# Altium PCB PROTO_QTOUCH.PcbDoc
Units mil, origin at the board's own origin, x right, y up, seen from the top; angles counter-clockwise.
Board outline 2460.63 x 2460.63 mil, 4 copper layers (Top Layer, Ground Plane, Power Plane, Bottom Layer), stack 64.6 mil thick; 61 components, 100 nets, 292 pads, 150 vias.
Unrouted connection lines stored in the file: 1.
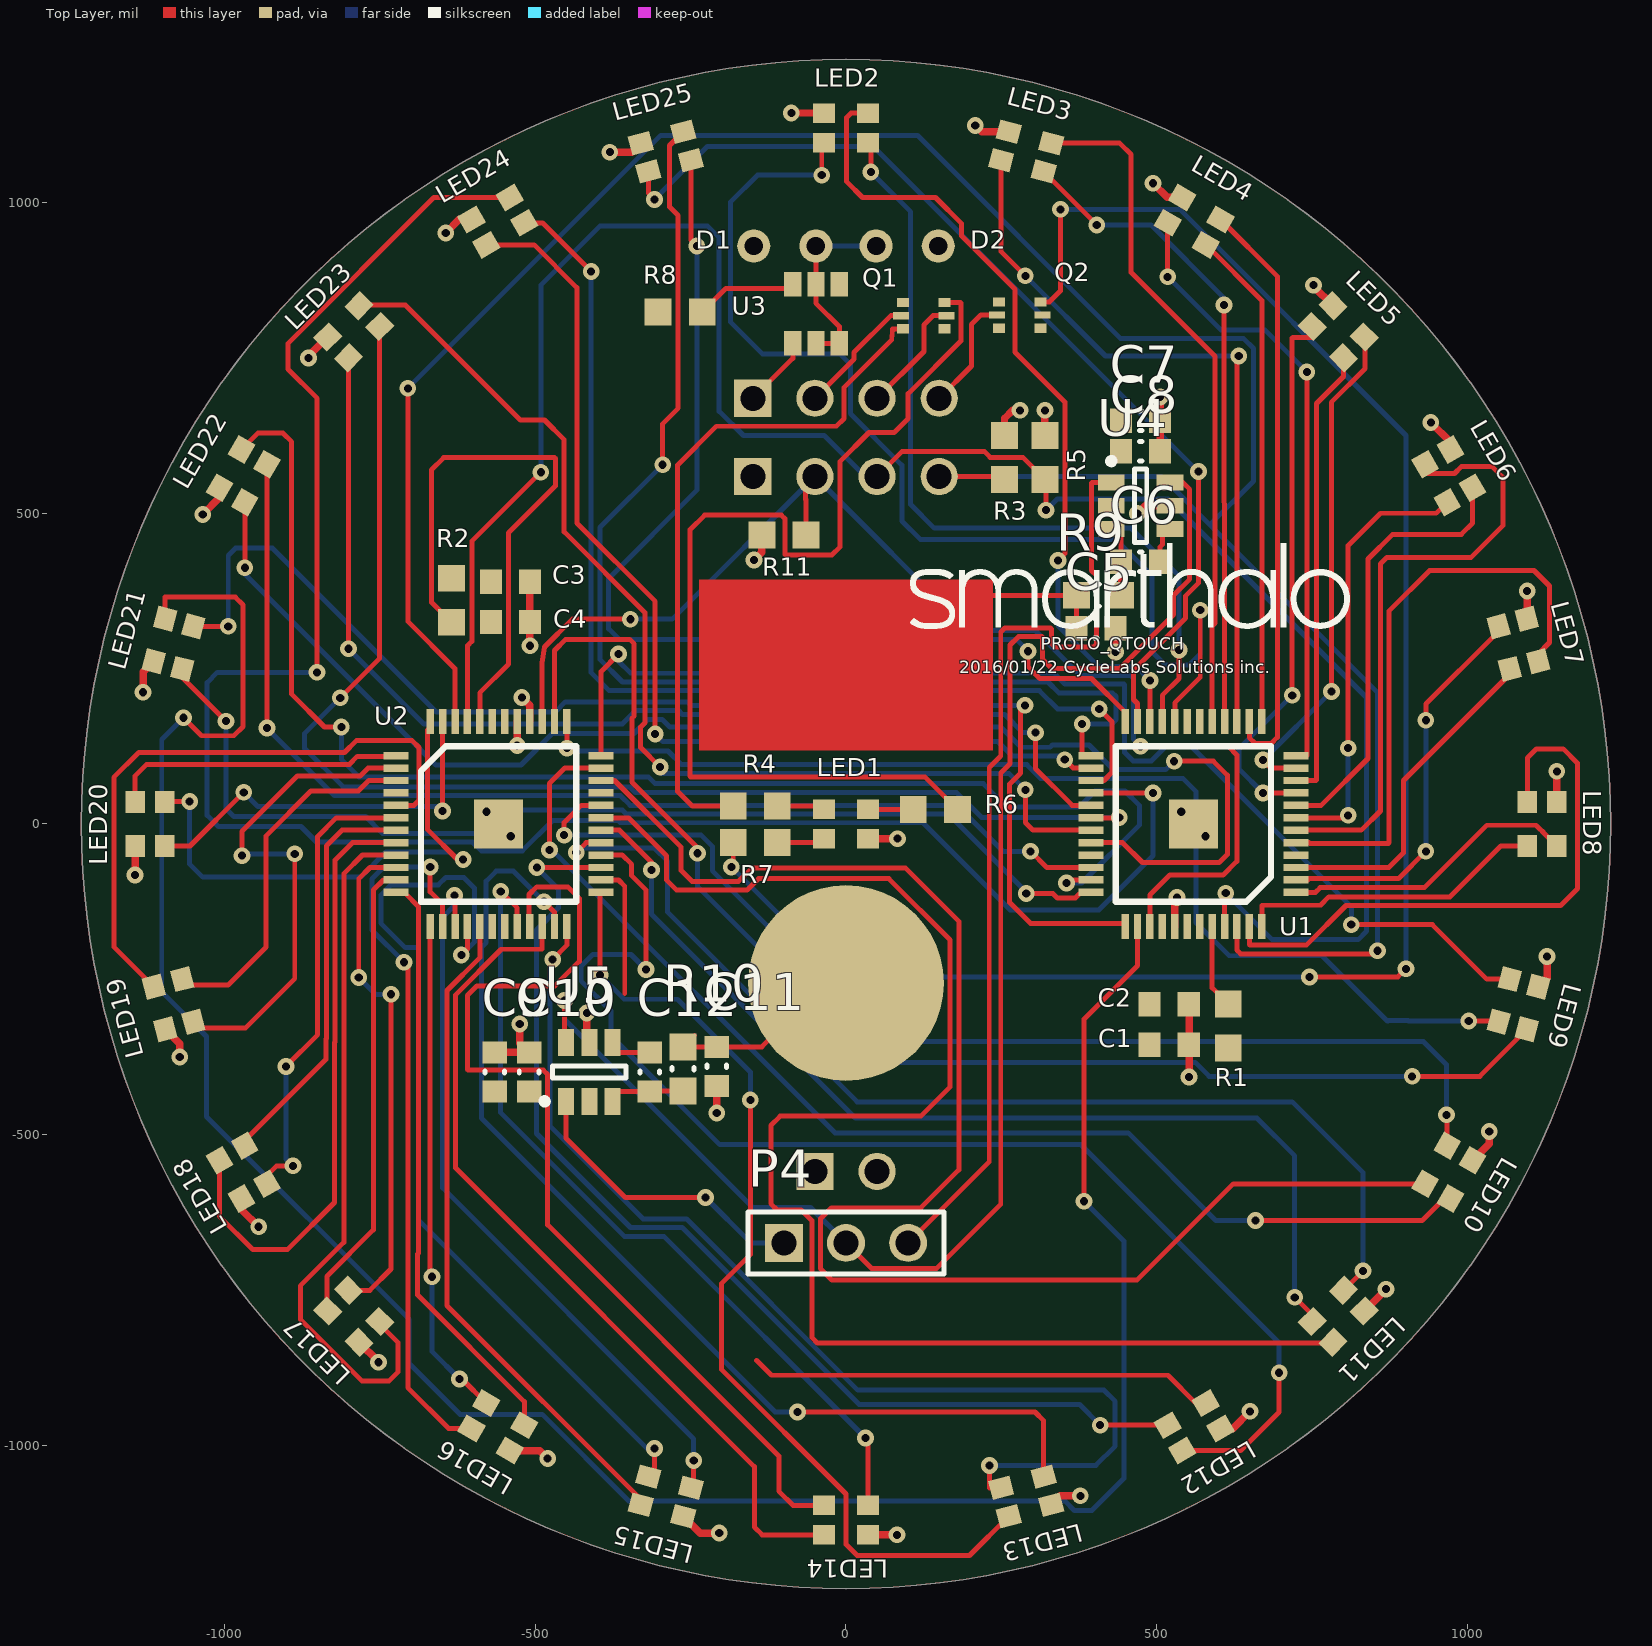
[diagram p0: Top Layer view]
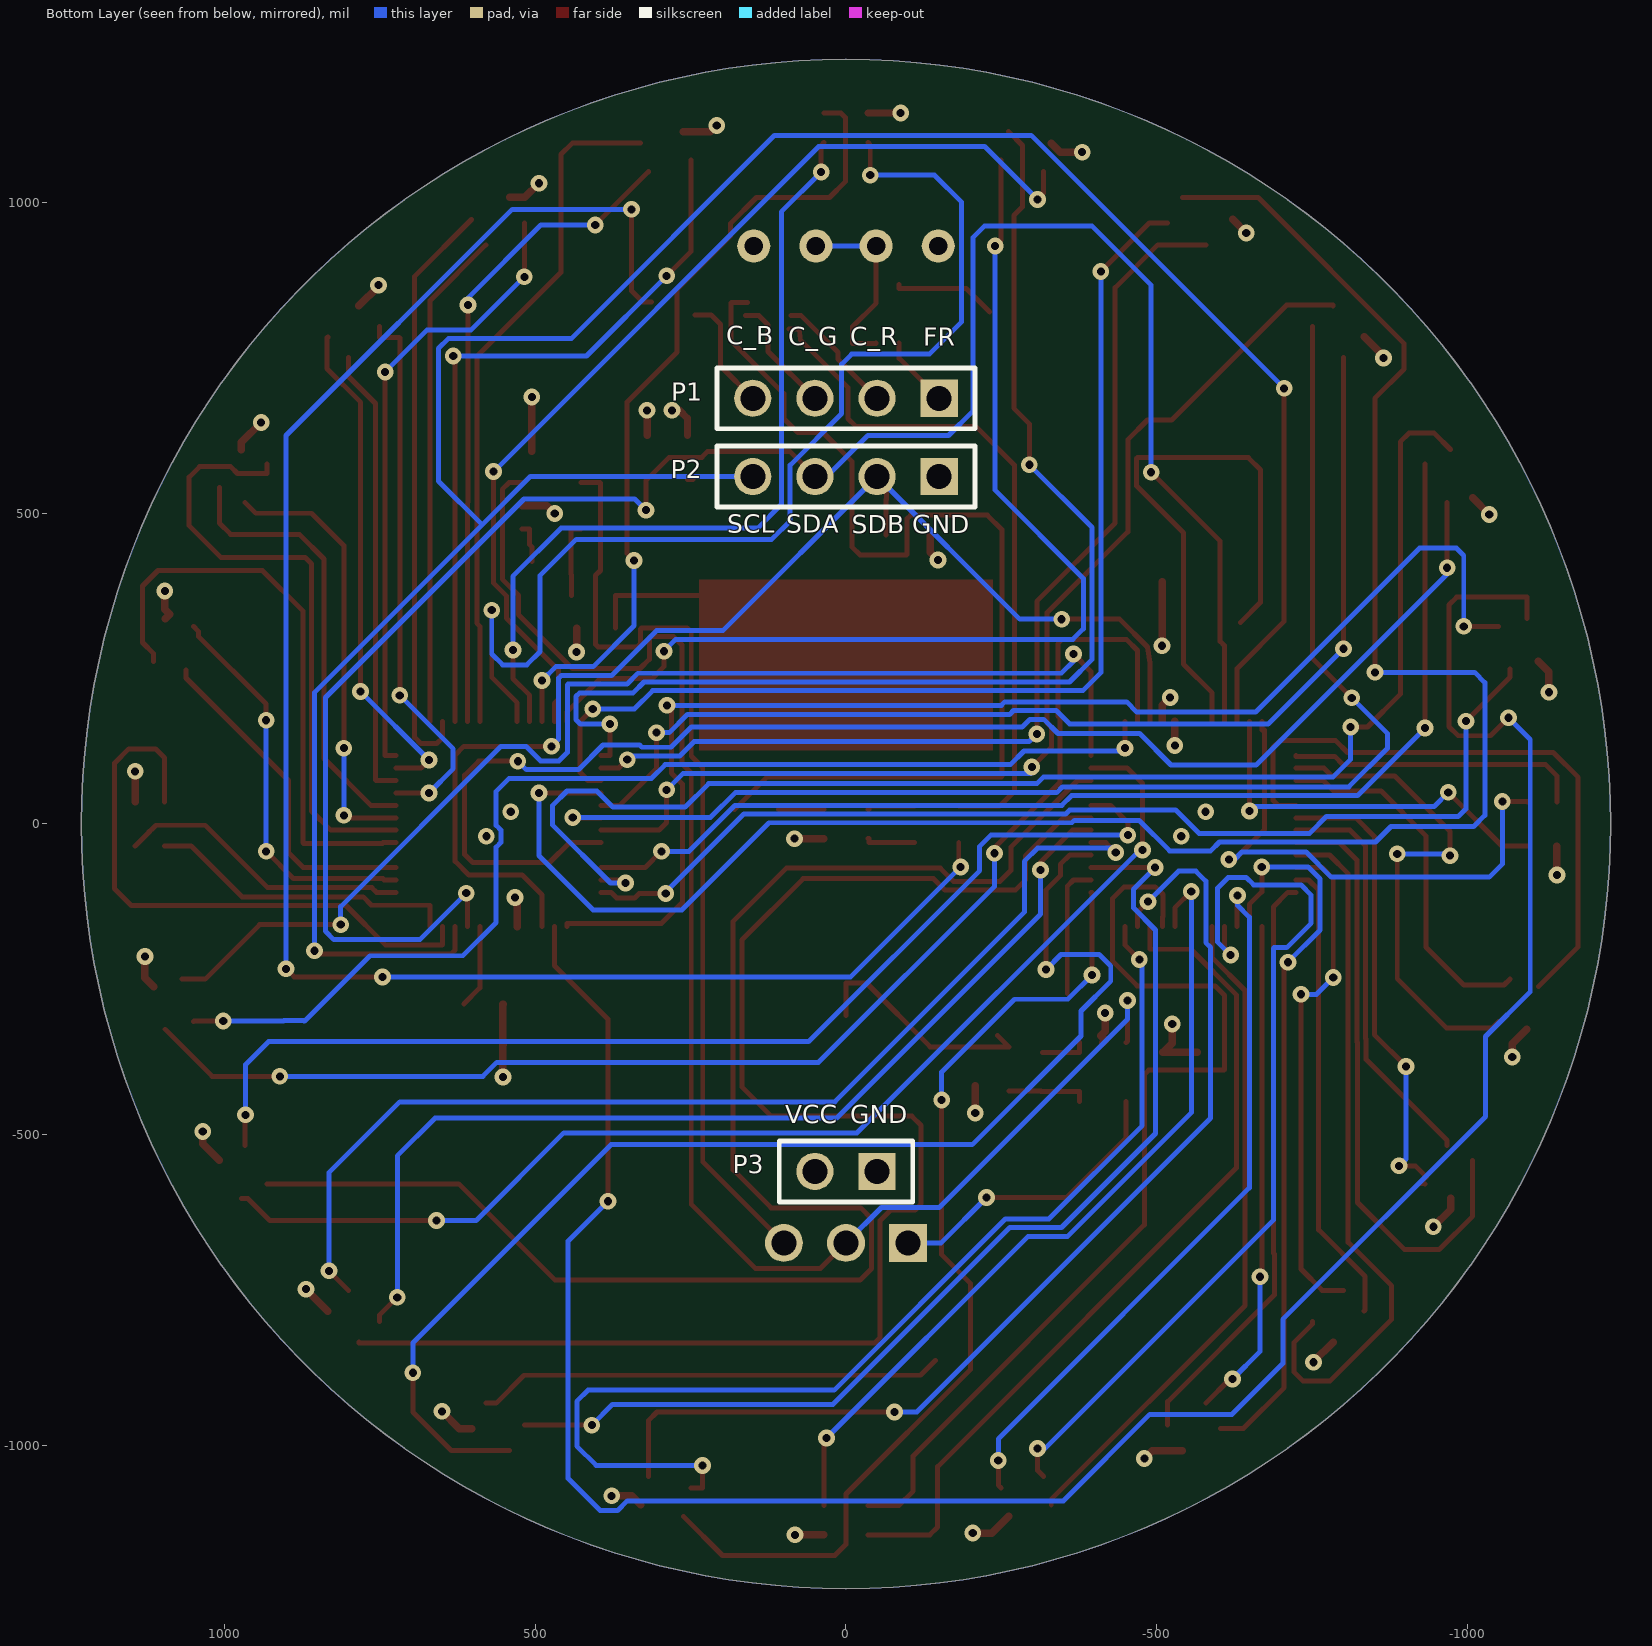
[diagram p1: Bottom Layer view, seen from below]
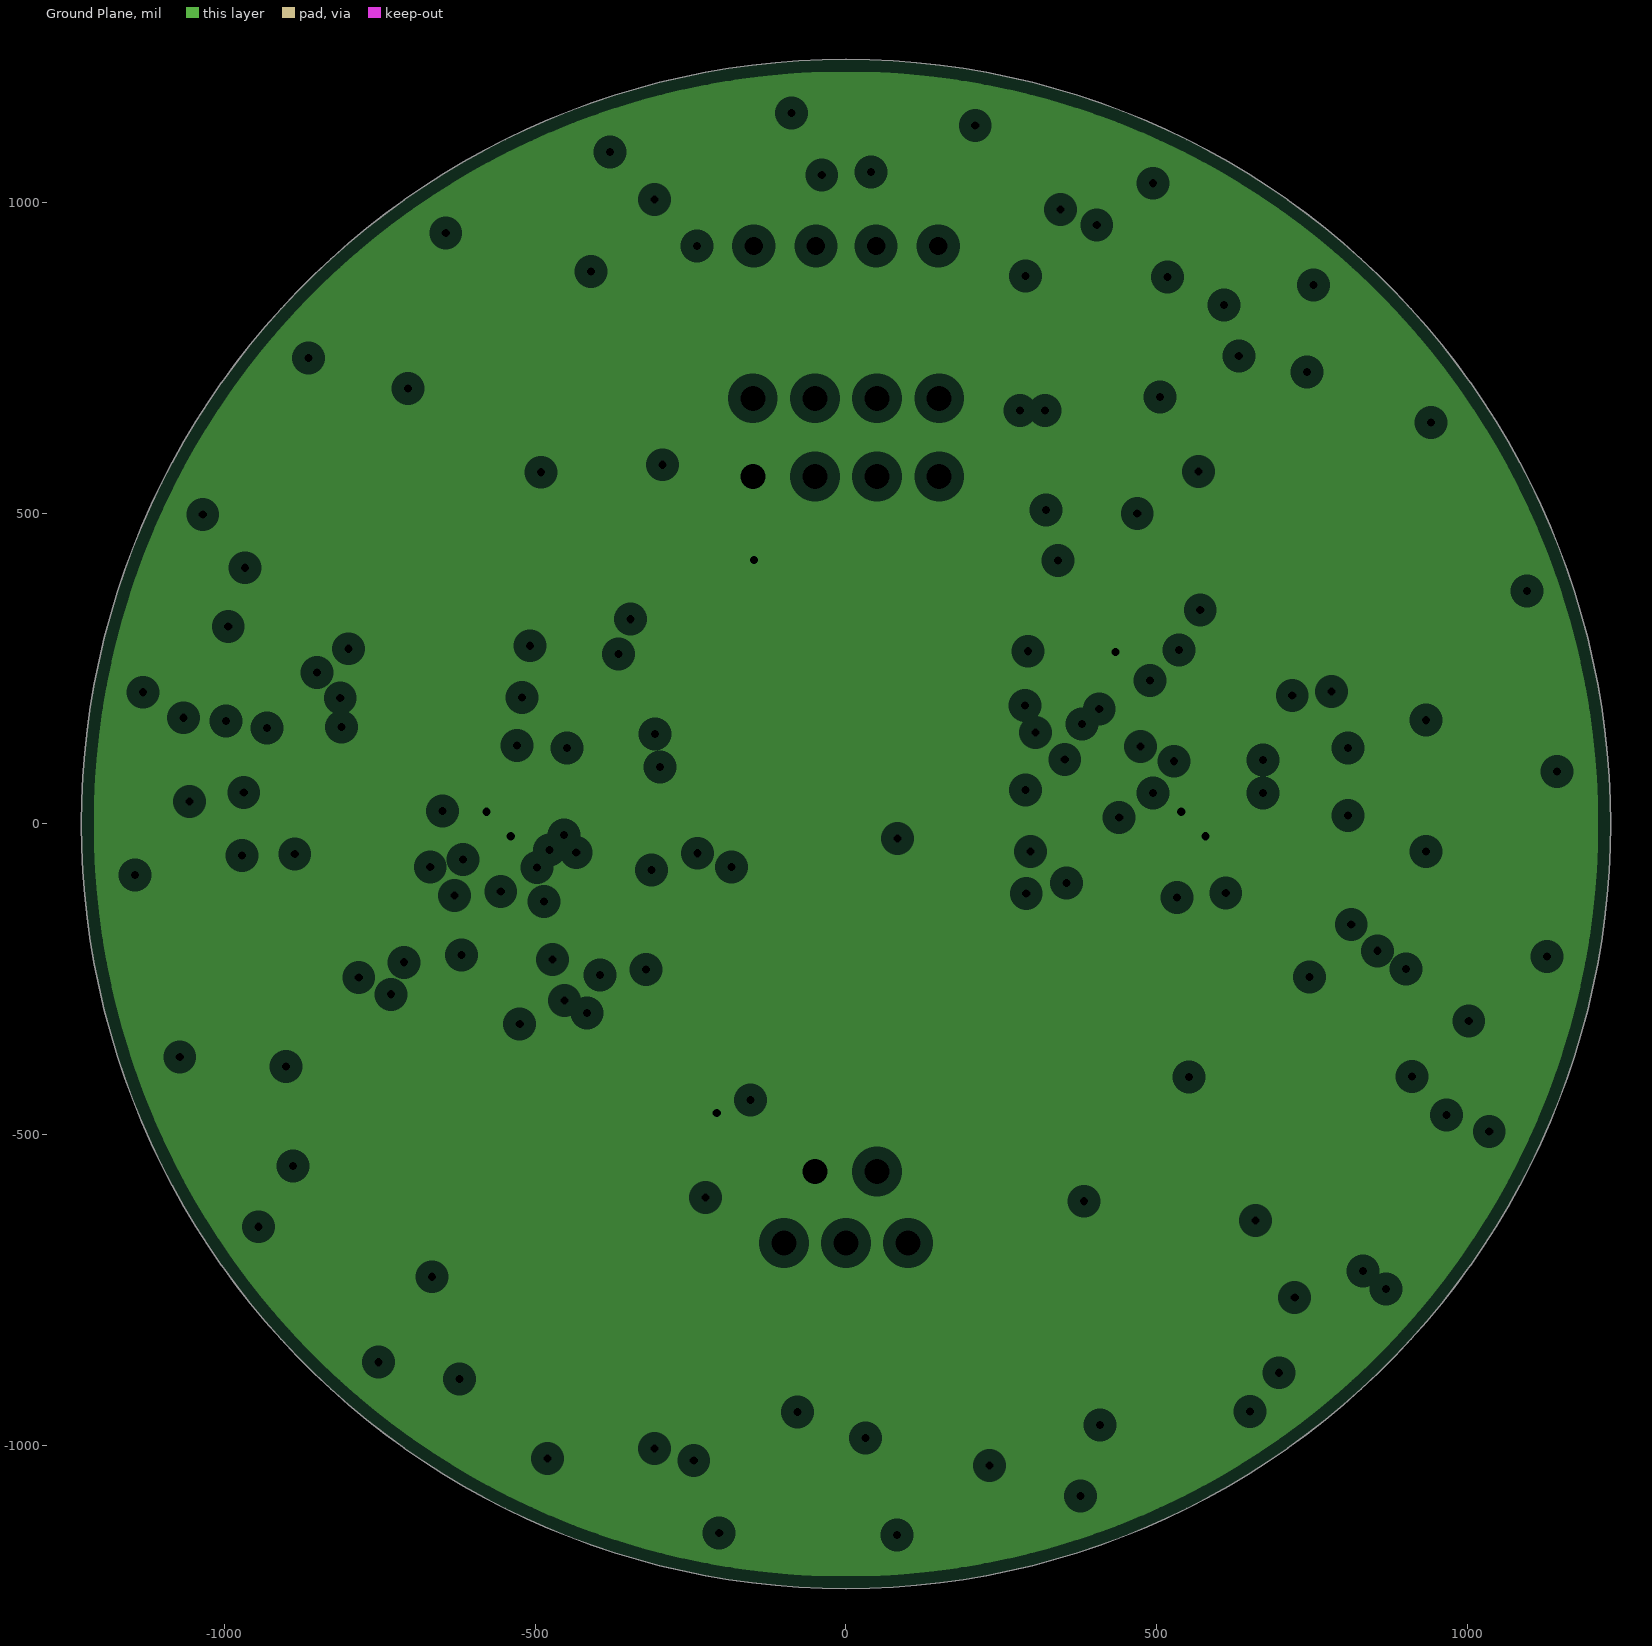
[diagram p2: Ground Plane, clearances drawn from the general rule]
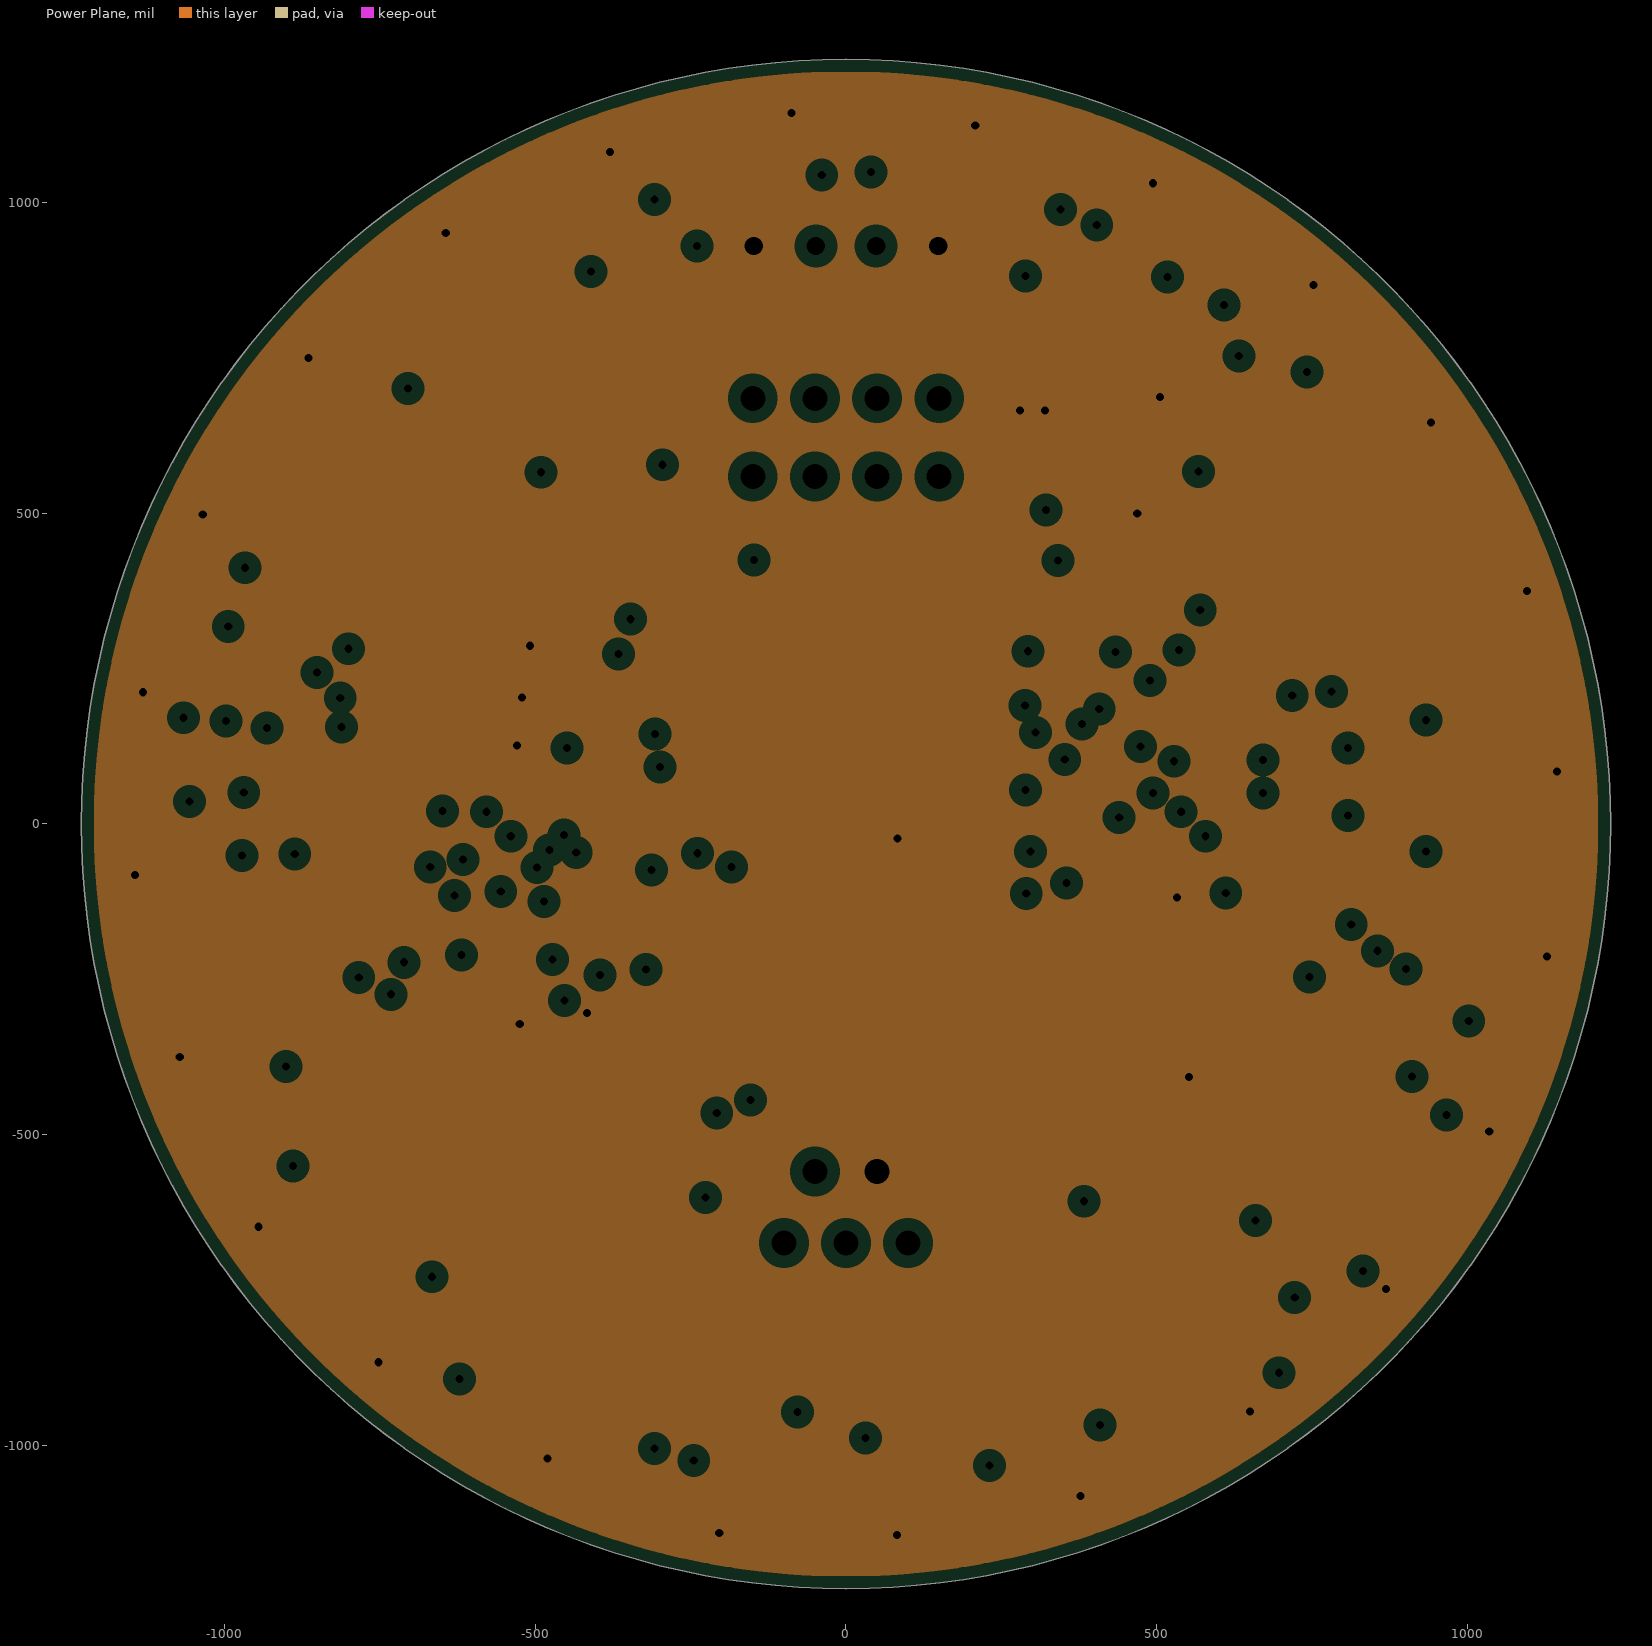
[diagram p3: Power Plane, clearances drawn from the general rule]

## Layer stack, top to bottom
Top Solder: solder mask 1, Solder Resist, Dk 3.5
Top Layer: signal copper 1.4
Dielectric 1: prepreg 6.7, FR408, Dk 3.66
Ground Plane: plane copper 0.7, net GND
Core: core 47, FR408, Dk 3.66
Power Plane: plane copper 0.7, net VCC
Dielectric 2: prepreg 6.7, FR408, Dk 3.66
Bottom Layer: signal copper 1.4
Bottom Solder: solder mask 1, Solder Resist, Dk 3.5

## Board outline
0,-1230.32 cw(c0,0) -1230.32,0 cw(c0,0) 0,1230.32 cw(c0,0) 1230.32,0 cw(c0,0)

## Design rules (kind name [scope] priority, off if disabled: settings)
AcuteAngle [All] p1: minimum=6.00000000000000E+0001 checktracksonly=FALSE
BoardOutlineClearance [All] p1: gap=15
Clearance Clearance_CAPIN1 [InNamedPolygon('NONET_L01_P002') vs InNet('CAPIN1')] p1: gap=98.43
Clearance Clearance_CAPIN2 [InNamedPolygon('NONET_L01_P002') vs InNet('CAPIN2')] p2: gap=98.43
Clearance [All] p3: gap=6
FanoutControl Fanout_LCC [IsLCC] p1: bgadir=Out bgaviamode=Centered fanoutstyle=Auto fanoutdirection=Alternating viagrid=1 // Fanout_LCC (Default Rule)
FanoutControl Fanout_BGA [IsBGA] p2: bgadir=Out bgaviamode=Centered fanoutstyle=Auto fanoutdirection=Alternating viagrid=1 // Fanout_BGA (Default Rule)
FanoutControl Fanout_Default [All] p4: bgadir=Out bgaviamode=Centered fanoutstyle=Auto fanoutdirection=Alternating viagrid=1 // Fanout_Default (Default Rule)
FanoutControl Fanout_Small [(CompPinCount < 5)] p5: bgadir=Out bgaviamode=Centered fanoutstyle=Auto fanoutdirection=OutThenIn viagrid=1 // Fanout_Small (Default Rule)
Height Height_TOP [OnLayer('Top Layer')] p2: minheight=0 maxheight=118.11 prefheight=39.37
Height Height_BOT [OnLayer('Bottom Layer')] p3: minheight=0 maxheight=787.4 prefheight=118.11
HoleSize [All] p1: absolutevalues=TRUE maxlimit=100 minlimit=13 maxpercent=80.000 minpercent=20.000
HoleToHoleClearance [All] p1: gap=6 allowstackedmicrovias=TRUE
MinimumAnnularRing [All] p1: minimumring=7
MinimumSolderMaskSliver [All] p1: minsoldermaskwidth=4
PlaneClearance [All] p1: clearance=20
PlaneConnect [All] p1: planeconnectstyle=Relief reliefexpansion=20 reliefentries=4 reliefconductorwidth=10 reliefairgap=10
PolygonConnect [All] p1: connectstyle=Relief reliefconductorwidth=10 reliefentries=4 polygonreliefangle="90 Angle" airgapwidth=10
RoutingVias [All] p1: holewidth=13 width=27 viastyle="Through Hole" minholewidth=13 minwidth=27 maxholewidth=28 maxwidth=50
SilkToBoardRegionClearance SilkToBoardRegionClearance_1 [All] p2:
SolderMaskExpansion [All] p1: expansion=4
Width Width_VBAT [InNet('VBAT')] p1: maxlimit=50 minlimit=8 preferedwidth=12
Width Width_BATSENSE [InNet('BAT_SENSE')] p2: maxlimit=50 minlimit=8 preferedwidth=12
Width Width_VCC [InNet('VCC')] p3: maxlimit=50 minlimit=8 preferedwidth=12
Width Width_GND [InNet('GND')] p4: maxlimit=20 minlimit=8 preferedwidth=12
Width [All] p5: maxlimit=10 minlimit=6 preferedwidth=8
21 further rules are at their usual default settings.

## Classes and differential pairs
component class TOUCH: C5 C6 C7 C8 C9 C10 C11 C12 P4 R9 R10 U4 U5
component class CENTRALLEDS: LED1
component class DRIVERS_CONNECTORS: C1 C2 C3 C4 D1 D2 P1 P2 P3 Q1 Q2 R1 R2 R3 R4 R5 R6 R7 R8 R11 R17 U1 U2 U3
component class LEDS: LED2 LED3 LED4 LED5 LED6 LED7 LED8 LED9 LED10 LED11 LED12 LED13 LED14 LED15 LED16 LED17 LED18 LED19 LED20 LED21 LED22 LED23 LED24 LED25

## Components (designator, comment, footprint, x,y, rotation, side; value= is the part's Value field where it differs from the comment)
C1 "1.0uF" CAPC0603(1608)100_N 520,-355 r180 top locked
C2 "100.0nF" CAPC0603(1608)100_N 520,-290 r180 top locked
C3 "1.0uF" CAPC0603(1608)100_N -540,390 r180 top locked
C4 "100.0nF" CAPC0603(1608)100_N -540,325 r180 top locked
C5 "TBD nF" CAPC0603(1608)100_N 402,315 r0 top
C6 "TBD nF" CAPC0603(1608)100_N 474,422 r180 top
C7 "1.0uF" CAPC0603(1608)100_N 474,649 r180 top
C8 "100.0nF" CAPC0603(1608)100_N 474,600 r180 top
C9 "1.0uF" CAPC0603(1608)100_N -565,-399 r270 top
C10 "100.0nF" CAPC0603(1608)100_N -510,-399 r270 top
C11 "TBD nF" CAPC0603(1608)100_N -208,-390 r270 top
C12 "TBD nF" CAPC0603(1608)100_N -316,-399 r270 top
D1 "C503C-WAS" FRONTLED_PADS -98.43,930 r0 top
D2 "C503C-WAS" FRONTLED_PADS 98.43,930 r180 top
LED1 "LTSN-N213EGBW" LTSN-N213EGBW 0,0 r90 top locked
LED2 "LTSN-N213EGBW" LTSN-N213EGBW 0,1120.08 r270 top locked
LED3 "LTSN-N213EGBW" LTSN-N213EGBW 289.9,1081.91 r255 top locked
LED4 "LTSN-N213EGBW" LTSN-N213EGBW 560.04,970.02 r240 top locked
LED5 "LTSN-N213EGBW" LTSN-N213EGBW 792.02,792.02 r225 top locked
LED6 "LTSN-N213EGBW" LTSN-N213EGBW 970.02,560.04 r210 top locked
LED7 "LTSN-N213EGBW" LTSN-N213EGBW 1081.91,289.9 r195 top locked
LED8 "LTSN-N213EGBW" LTSN-N213EGBW 1120.08,0 r180 top locked
LED9 "LTSN-N213EGBW" LTSN-N213EGBW 1081.91,-289.9 r165 top locked
LED10 "LTSN-N213EGBW" LTSN-N213EGBW 970.02,-560.04 r150 top locked
LED11 "LTSN-N213EGBW" LTSN-N213EGBW 792.02,-792.02 r135 top locked
LED12 "LTSN-N213EGBW" LTSN-N213EGBW 560.04,-970.02 r120 top locked
LED13 "LTSN-N213EGBW" LTSN-N213EGBW 289.9,-1081.91 r105 top locked
LED14 "LTSN-N213EGBW" LTSN-N213EGBW 0,-1120.08 r90 top locked
LED15 "LTSN-N213EGBW" LTSN-N213EGBW -289.9,-1081.91 r75 top locked
LED16 "LTSN-N213EGBW" LTSN-N213EGBW -560.04,-970.02 r60 top locked
LED17 "LTSN-N213EGBW" LTSN-N213EGBW -792.02,-792.02 r45 top locked
LED18 "LTSN-N213EGBW" LTSN-N213EGBW -970.02,-560.04 r30 top locked
LED19 "LTSN-N213EGBW" LTSN-N213EGBW -1081.91,-289.9 r15 top locked
LED20 "LTSN-N213EGBW" LTSN-N213EGBW -1120.08,0 r0 top locked
LED21 "LTSN-N213EGBW" LTSN-N213EGBW -1081.91,289.9 r345 top locked
LED22 "LTSN-N213EGBW" LTSN-N213EGBW -970.02,560.04 r330 top locked
LED23 "LTSN-N213EGBW" LTSN-N213EGBW -792.02,792.02 r315 top locked
LED24 "LTSN-N213EGBW" LTSN-N213EGBW -560.04,970.02 r300 top locked
LED25 "LTSN-N213EGBW" LTSN-N213EGBW -289.9,1081.91 r285 top locked
P1 "MTLW-104-07-L-S-125" SMTC-MTLW-104-07-X-S-125 -150,685 r0 bottom locked
P2 "MTLW-104-07-L-S-125" SMTC-MTLW-104-07-X-S-125 -150,559.06 r0 bottom locked
P3 "MTLW-102-05-G-S-172" SMTC-MTLW-102-05-X-S-172 -50,-559.06 r0 bottom locked
P4 "TSW-103-07-F-S" SMTC-TSW-103-07-X-S -100,-674 r0 top
Q1 "NX3020NAKV" SOT666 125,817.91 r0 top
Q2 "NX3020NAKV" SOT666 279.53,818.9 r0 top
R1 "3.3 kOhm" RESC0603(1608)_M 615,-325 r270 top locked
R2 "3.3 kOhm" RESC0603(1608)_M -635,360 r90 top locked
R3 "4.7 kOhm" RESC0603(1608)_M 255,590 r90 top locked
R4 "62 Ohm" RESC0603(1608)_M -146,29 r0 top locked
R5 "4.7 kOhm" RESC0603(1608)_M 320,590 r90 top locked
R6 "130 Ohm" RESC0603(1608)_M 143.7,23.62 r180 top locked
R7 "62 Ohm" RESC0603(1608)_M -146,-30 r0 top locked
R8 "27 Ohm" RESC0603(1608)_M -266.73,823.82 r0 top
R9 "TBD Ohm" RESC0603(1608)_M 406,368 r180 top (schematic designator R11)
R10 "TBD Ohm" RESC0603(1608)_M -262,-394 r90 top
R11 "100 kOhm" RESC0603(1608)_M -100,465 r0 top locked
U1 "IS31FL3236-TQLS2" TQFP48 559.06,0 r180 top locked
U2 "IS31FL3236-TQLS2" TQFP48 -559.06,0 r0 top locked
U3 "IS31LT3171" SOT23-6 -48.23,820.87 r0 top
U4 "AT42QT1010" 6ST1_N 474,512 r0 top
U5 "AT42QT1010" 6ST1_N -413,-399 r90 top

## Footprints (in the part's own frame and the unit in brackets; to place one, negate y for a bottom-side part, rotate by r counter-clockwise, add the part's x,y. Pads: shape width x height; smd on the part's side, far side on the other; paste and mask are expansions set on the pad)
6ST1_N [mm] "SOT23, 6-Leads, Body 2.9x1.6mm, Pitch 0.95mm, Lead Span 2.8mm, IPC Medium Density"
  rect 1.1x0.65 smd: 1(-1.2,0.95) 2(-1.2,0) 3(-1.2,-0.95) 4(1.2,-0.95) 5(1.2,0) 6(1.2,0.95)
  silkscreen extent -1.32,-1.5 0.25,1.95, body extent -0.87,-1.5 0.87,1.5, height 1.45
CAPC0603(1608)100_N [mm] "Chip Capacitor, Body 1.6x0.8mm, Height 1.0mm, IPC Medium Density"
  rect 0.9x1 smd: 1(-0.8,0) 2(0.8,0)
  body extent -0.87,-0.48 0.88,0.47, height 1
FRONTLED_PADS [mm] "Front Led pads"
  round 1.35 hole 0.75: 1(-1.27,0) 2(1.27,0)
LTSN-N213EGBW [mm] "SMD LED LiteOn LTSN-N213EGBW, 2.1 x 2.1 mm, 1.2 x 1.8mm pitch"
  rect 0.8x0.9 smd: 1(-0.6,-0.9) 2(0.6,-0.9) 3(0.6,0.9) 4(-0.6,0.9)
  body extent -1.05,-1.05 1.05,1.05, height 1
RESC0603(1608)_M [mm] "Chip Resistor, Body 1.6x0.8mm, IPC Low Density"
  rect 1.1x1.1 smd: 1(-0.9,0) 2(0.9,0)
  body extent -0.85,-0.47 0.85,0.47, height 0.6
SMTC-MTLW-102-05-X-S-172 [mm] "Terminal Assembly, 1x2 Pins, Vertical, 2.54mm Pitch, Male"
  rect 1.52x1.52 hole 1.02: 1(0,0)
  round 1.52 hole 1.02: 2(2.54,0)
  silkscreen extent -1.46,-1.24 4,1.24
SMTC-MTLW-104-07-X-S-125 [mm] "Terminal Assembly, 1x4 Pins, Vertical, 2.54mm Pitch, Male"
  rect 1.52x1.52 hole 1.02: 1(0,0)
  round 1.52 hole 1.02: 2(2.54,0) 3(5.08,0) 4(7.62,0)
  silkscreen extent -1.46,-1.24 9.08,1.24, body extent -1.27,-1.24 8.89,1.24, height 4.7
SMTC-TSW-103-07-X-S [mm] ".025 SQ Post Terminal Strip Assembly, 1x3 Pins, Vertical, 2.54mm Pitch, Male"
  rect 1.55x1.55 hole 1.02: 1(0,0)
  round 1.55 hole 1.02: 2(2.54,0) 3(5.08,0)
  silkscreen extent -1.46,-1.27 6.54,1.27
SOT23-6 [mm] "SOT23-6 pins, 2.92 x 1.6 mm body, 0.7mm x 1mm pads, 0.95 x 2.4 mm pitch"
  rect 0.7x1 smd mask+0.051: 1(-0.95,-1.2) 2(0,-1.2) 3(0.95,-1.2) 4(0.95,1.2) 5(0,1.2) 6(-0.95,1.2)
  body extent -1.56,-0.9 1.56,0.9, height 1.35
SOT666 [mm] "SOT666, 1.3 x 1.7 x 0.6 mm body, 0.375 x 0.5 mm pads, 1.6 x 0.538 mm pitch"
  rect 0.5x0.375 smd mask+0.046: 1(-0.85,0.538) 3(-0.85,-0.538) 4(0.85,-0.538) 6(0.85,0.538)
  rect 0.65x0.3 smd mask+0.046: 2(-0.925,0) 5(0.925,0)
  body extent -0.65,-0.85 0.65,0.85, height 0.6
TQFP48 [mil] "TQFP48, 7 x 7 x 1.2 mm, 0.5 mm pitch"
  rect 40x12 smd mask+2: 1(-165,110) 2(-165,90) 3(-165,70) 4(-165,50) 5(-165,30) 6(-165,10) 7(-165,-10) 8(-165,-30) 9(-165,-50) 10(-165,-70) 11(-165,-90) 12(-165,-110) 25(165,-110) 26(165,-90) 27(165,-70) 28(165,-50) 29(165,-30) 30(165,-10) 31(165,10) 32(165,30) 33(165,50) 34(165,70) 35(165,90) 36(165,110)
  rect 12x40 smd mask+2: 13(-110,-165) 14(-90,-165) 15(-70,-165) 16(-50,-165) 17(-30,-165) 18(-10,-165) 19(10,-165) 20(30,-165) 21(50,-165) 22(70,-165) 23(90,-165) 24(110,-165) 37(110,165) 38(90,165) 39(70,165) 40(50,165) 41(30,165) 42(10,165) 43(-10,165) 44(-30,165) 45(-50,165) 46(-70,165) 47(-90,165) 48(-110,165)
  rect 78.74x78.74 smd: 49(0,0)
  silkscreen extent -125,-125 125,125, body extent -138,-138 138,138, height 47

## Part data
C1 C2 C3 C4 C5 C7 C8 C9 C10 C11: library part CAP0603, "Chip Cap 0603 X7R 10%"
C6 C12: library part CAP0603, "Chip Cap 0603 C0G best or X7R or X5R 10%"
D1 D2: "Cree 5mm Round LED C503C-WAS"
LED1 LED2 LED3 LED4 LED5 LED6 LED7 LED8 LED9 LED10 LED11 LED12 LED13 LED14 LED15 LED16 LED17 LED18 LED19 LED20 LED21 LED22 LED23 LED24 LED25: "LED SMD LTSN-N213EGBW"
P1 P2: library part SMTC-MTLW-104-07-X-S-125, "Low Profile .025\" SQ Post Header, Through-hole, Vertical, -55 to 125 degC, 2.54 mm Pitch, 4-Pin, Male, RoHS"
P3: library part SMTC-MTLW-102-05-X-S-172, "Low Profile .025\" SQ Post Header, Through-hole, Vertical, -55 to 125 degC, 2.54 mm Pitch, 2-Pin, Male, RoHS"
P4: library part CMP-1024-00331-1, "0.025\" SQ Post Header, Through-hole, Vertical, -55 to 125 degC, 2.54 mm Pitch, 3-Pin, Male, RoHS"
Q1 Q2: "30 V, 200 mA dual N-channel Trench MOSFET"
R1 R2: library part CMP-1012-00090-1, "3K3 0.1W 5% 0603 (1608 Metric)  SMD"
R3 R5: library part CMP-1012-00090-1, "4K7 0.1W 5% 0603 (1608 Metric)  SMD"
R4 R7: library part CMP-1012-00090-1, "62R 0.1W 5% 0603 (1608 Metric)  SMD"
R6: library part CMP-1012-00090-1, "130R 0.1W 5% 0603 (1608 Metric)  SMD"
R8: library part CMP-1012-00090-1, "27R 0.1W 5% 0603 (1608 Metric)  SMD"
R9 R10: library part CMP-1012-00090-1, "TBDR TBDW 10% <200ppm/C 0603 (1608 Metric)  SMD"
R11: library part CMP-1012-00090-1, "100k 0.1W 5% 0603 (1608 Metric)  SMD"
U1 U2: "IC 36 CHANNELS LED DRIVER"
U3: "10-TO-150MA CONSTANT-CURRENT LED DRIVER"
U4 U5: "Single-key QTouch® Touch Sensor IC"

## Free pads (board coordinates)
  round 314.96 smd paste-314.96: 1(0,-255.91)

## Via types
v1: diameter 27, hole 13, Top Layer to Bottom Layer, tented top, 150 vias

## Nets (pads, with @x,y where several pads share a name; then routed paths per layer and width w, separated by ;. In a path a pad name is that pad's centre, name@x,y a point inside that pad or via, vN(x,y) a via of type N, cw(c..) or ccw(c..) an arc to the next point about the centre after c; other vN are vias at no path point)
CAPIN1: C5.1 R9.2 | length 209.6
  Top Layer w8: 214,368 R9.2@370.5,368 ; C5.1 R9.2@370.5,368 ; R9.2 R9.2@370.5,368
CAPIN2: C11.1 pad.1 R10.2 | length 382.1
  Top Layer w8: R10.2@-244,-340.57 R10.2 -216,-358.57 -216,-358.5 C11.1 -135.5,-358.5 -32.91,-255.91 pad.1 pad.1@0,-308
CATHODE_FL: D1.2 D2.2 U3.2 U3.3 U3.5 | length 369.6
  Top Layer w8: U3.2 -48.23,773 -10.83,773 U3.3 -10.83,800.4 -48.43,838 D1.2 -48,929.57 -48,902 -48.23,901.77 U3.5
  Bottom Layer w8: D1.2 D2.2
CENTRAL_B: P1.4 Q2.2 | length 187.8
  Top Layer w8: P1.4 202,737 202,804 216.9,818.9 Q2.2
CENTRAL_G: P1.3 Q1.5 | length 191.6
  Top Layer w8: P1.3 125.38,760.38 125.38,803.29 140,817.91 Q1.5
CENTRAL_R: P1.2 Q1.2 | length 200
  Top Layer w8: P1.2 13,748 13,758.91 72,817.91 Q1.2
FRONTLED: P1.1 U3.1 | length 115.3
  Top Layer w8: P1.1 -85.63,749.37 U3.1
GND: C1.2 C2.2 C3.2 C4.2 C5.2 C7.2 C8.2 C9.2 C10.2 C11.2 P2.1 P3.1 Q1.1 Q1.4 Q2.1 Q2.3 Q2.4 Q2.5 R1.2 R2.2 R8.1 R11.1 U1.4 U1.18 U1.19 U1.33 U1.40 U1.42 U1.43 U1.49 U2.4 U2.18 U2.19 U2.33 U2.42 U2.43 U2.49 U3.4 U4.2 U5.2 | length 127
  Top Layer w12: v1(-208,-465) C11.2 ; v1(-147.93,424.85) -135.43,437.35 R11.1 ; v1(433.5,276.81) C5.2
  other v1: -539.37,-19.68 578.74,-19.68 -578.74,19.69 539.37,19.69
NetC6_1: C6.1 U4.4 | length 66.3
  Top Layer w8: C6.1 505.5,446 509,449.5 509,474.6 U4.4
NetC6_2: C6.2 R9.1 U4.3 | length 122.8
  Top Layer w8: U4.3 442.5,474.6 C6.2 442.5,402 441.43,400.93 R9.1
NetC12_1: C12.1 U5.4 | length 75.3
  Top Layer w8: U5.4 -375.6,-367.5 C12.1
NetC12_2: C12.2 R10.1 U5.3 | length 130.4
  Top Layer w8: U5.3 -375.6,-430.5 C12.2 -314,-430.5 -314,-429.43 R10.1
NetLED1_2: LED1.2 R6.2 | length 72.8
  Top Layer w8: LED1.2 R6.2
NetLED1_3: LED1.3 R4.2 | length 80.5
  Top Layer w8: R4.2 -37,29 -37,23.62 LED1.3
NetLED1_4: LED1.4 R7.2 | length 81.5
  Top Layer w8: R7.2 -37,-30 -37,-23.62 LED1.4
NetLED2_2: LED2.2 U1.20 | length 1840.9
  Top Layer w8: v1(-39,1044) -39,1092.89 LED2.2 ; U1.20 529.06,195.06 570,236 v1(570,344)
  Bottom Layer w8: v1(-39,1044) -142.5,1044 -186,1000.5 -186,808 -134,756 -9,756 7,740 7,660.42 89.92,577.5 89.92,487.58 119.5,458 434,458 492,400 492,277.5 513.5,256 552.5,256 570,273.5 v1(570,344)
NetLED2_3: LED2.3 U1.21 | length 1335.4
  Top Layer w8: LED2.3 40,1091.89 v1(40,1049) ; U1.21 509.06,207.06 536,234 v1(536,280)
  Bottom Layer w8: v1(40,1049) 103.92,985.08 103.92,514.08 142,476 458.59,476 536,398.59 v1(536,280)
NetLED2_4: LED2.4 U1.22 | length 1324.3
  Top Layer w8: LED2.4 8,1143.7 1,1136.7 1,1033.5 26.5,1008 144,1008 186,966 186,946 271.81,860.19 271.81,759.19 352,679 352,435 v1(341,424) ; U1.22 v1(489.06,231)
  Bottom Layer w8: v1(341,424) 341,319.01 406.75,253.26 466.79,253.26 v1(489.06,231)
NetLED3_2: LED3.2 U1.15 | length 1188.5
  Top Layer w8: LED3.2 249.56,921 v1(288.56,882) ; U1.15 629.06,750.06 v1(632,753)
  Bottom Layer w8: v1(288.56,882) 417.56,753 v1(632,753)
NetLED3_3: LED3.3 U1.16 | length 1056.1
  Top Layer w8: LED3.3 318.01,1049.42 v1(403.43,964) ; v1(608,835) 609.06,197.94 U1.16
  Bottom Layer w8: v1(403.43,964) 490.65,964 608,846.65 v1(608,835)
NetLED3_4: LED3.4 U1.17 | length 1106.4
  Top Layer w8: LED3.4 440.39,1095.56 458.45,1077.5 458.45,887.69 594,752.15 594,323 589.06,318.06 U1.17
NetLED4_2: LED4.2 U1.12 | length 1009.1
  Top Layer w8: v1(517.54,880.46) LED4.2 ; U1.12 741.5,110 v1(741.5,727.5)
  Bottom Layer w8: v1(517.54,880.46) 603,795 674,795 v1(741.5,727.5)
NetLED4_3: LED4.3 U1.13 | length 804.6
  Top Layer w8: LED4.3 579.65,931.84 669.06,842.44 U1.13
NetLED4_4: LED4.4 U1.14 | length 950.2
  Top Layer w8: LED4.4 694,881.29 694,139.5 684,129.5 658.5,129.5 649.06,138.94 U1.14
NetLED5_2: LED5.2 U1.9 | length 886.9
  Top Layer w8: v1(671,50) U1.9 ; v1(718,207) 718,782 719,783 750.26,783 LED5.2
  Bottom Layer w8: v1(671,50) 632,89 632,121 v1(718,207)
NetLED5_3: LED5.3 U1.10 | length 730.6
  Top Layer w8: U1.10 756,70 757,71 757,676.63 800.37,720 LED5.3
NetLED5_4: LED5.4 U1.11 | length 808.6
  Top Layer w8: v1(671,103) 671,102.5 683.5,90 U1.11 ; v1(781,213) 781,678.5 835,732.5 835,783 833.77,783 LED5.4
  Bottom Layer w8: v1(671,103) v1(781,213)
NetLED6_2: LED6.2 U1.6 | length 998.4
  Top Layer w8: U1.6 829,-10 860,21 860,418.5 870.5,429 1006,429 1057,480 1057,558 1040,575 990,575 979,564 931.84,564 LED6.2
NetLED6_3: LED6.3 U1.7 | length 707.7
  Top Layer w8: U1.7 804,10 v1(808,14) ; v1(808,122) 808,448 860,500 949.73,500 LED6.3
  Bottom Layer w8: v1(808,14) v1(808,122)
NetLED6_4: LED6.4 U1.8 | length 717.2
  Top Layer w8: U1.8 764.5,30 840,105.5 840,426.5 879.69,466.19 990,466.19 1008.19,484.38 LED6.4
NetLED7_2: LED7.2 U1.2 | length 638.4
  Top Layer w8: U1.2 743,-90 745,-88 889,-88 v1(933,-44) ; v1(933,167) 933,193 1042,302 1042,310.08 LED7.2
  Bottom Layer w8: v1(933,-44) v1(933,167)
NetLED7_3: LED7.3 U1.3 | length 545.6
  Top Layer w8: U1.3 873.5,-70 897,-46.5 897,70 1062,235 LED7.3@1062,248.07
NetLED7_4: LED7.4 U1.5 | length 947.8
  Top Layer w8: U1.5 745,-30 746,-31 873,-31 874,-30 874,343 939,408 1107,408 1132,383 1132,292.1 1113.9,274 LED7.4
NetLED8_2: LED8.2 U1.47 | length 964.2
  Top Layer w8: U1.47 649.06,-194 650.06,-195 740.74,-195 804.54,-131.21 1149.79,-131.21 1177,-104 1177,98 1154,121 1111,121 1096.46,106.46 LED8.2
NetLED8_3: LED8.3 U1.48 | length 500.6
  Top Layer w8: U1.48 669.06,-131 764.21,-130 777,-117.21 971.79,-117.21 1053.57,-35.43 LED8.3
NetLED8_4: LED8.4 U1.1 | length 478.4
  Top Layer w8: U1.1 755.5,-110 763,-102.5 930.5,-102.5 1031,-2 1110.27,-2 1115.98,-7.72 1116.35,-7.72 1122.2,-13.58 1122.2,-13.94 LED8.4
NetLED9_2: LED9.2 U2.36 | length 1933.1
  Top Layer w8: U2.36 -394.06,245.44 v1(-366,273.5) ; v1(813,-162) 943.44,-162 1031,-249.56 LED9.2
  Bottom Layer w8: v1(-366,273.5) -366,262 -346.56,242.56 334.94,242.56 352.5,225 447.33,225 448.33,224 448.33,115 461.83,101.5 491.5,101.5 515,125 555,125 813,-133 v1(813,-162)
NetLED9_3: LED9.3 U2.37 | length 1854.8
  Top Layer w8: U2.37 -449.06,122.06 v1(-449,122) ; v1(1002,-317) 1048.92,-317 LED9.3
  Bottom Layer w8: v1(-449,122) -444.5,117.5 -286.5,117.5 -264.5,95.5 291,95.5 313,73.5 542,73.5 563,52.5 563,-2.19 555.24,-9.95 555.24,-29.42 563,-37.18 563,-158.45 616.55,-212 766,-212 871,-317 872.27,-317 872.97,-316.3 904.03,-316.3 904.73,-317 v1(1002,-317)
NetLED9_4: LED9.4 U2.38 | length 2180.5
  Top Layer w8: U2.38 -469.06,279.04 -451.1,297 -347.94,297 -340.94,290 -340.94,173.56 -344.5,170 -344.5,67.57 -239.11,-37.82 v1(-239.11,-47.11) ; v1(911,-406) 1019.8,-406 LED9.4
  Bottom Layer w8: v1(-239.11,-47.11) -239.11,-100.19 44.2,-383.5 561.73,-383.5 584.23,-406 v1(911,-406)
NetLED10_2: LED10.2 U2.32 | length 1817.6
  Top Layer w8: v1(-453.5,-18) -453.5,2.5 -426,30 U2.32 ; v1(966,-468) 967.28,-469.28 LED10.2
  Bottom Layer w8: v1(-453.5,-18) -233,-18 -215,-36 -215,-75 60,-350 929,-350 966,-387 v1(966,-468)
NetLED10_3: LED10.3 U2.34 | length 2489.3
  Top Layer w8: U2.34 -372.5,70 -265.12,-37.38 -265.12,-74.88 -247.5,-92.5 -173.24,-92.5 -151.77,-71.03 95.87,-71.03 181.48,-156.63 181.48,-556.52 120.5,-617.5 -23.5,-617.5 -41,-635 -41,-715.5 -22.5,-734 468,-734 623.09,-578.91 LED10.3
NetLED10_4: LED10.4 U2.35 | length 1911.9
  Top Layer w8: v1(-477,-42) -477,65.5 -452.5,90 U2.35 ; v1(659,-638) 927,-638 962.46,-602.54 LED10.4
  Bottom Layer w8: v1(-477,-42) -472.83,-42 -17.83,-497 454,-497 595,-638 v1(659,-638)
NetLED11_2: LED11.2 U2.29 | length 1782.7
  Top Layer w8: v1(-434,-46) -418,-30 U2.29 ; LED11.2 800.74,-750.26 v1(832,-719)
  Bottom Layer w8: v1(-434,-46) -426.5,-38.5 -308.5,-38.5 -287,-60 -287,-142 18,-447 718,-447 832,-561 v1(832,-719)
NetLED11_3: LED11.3 U2.30 | length 1660.1
  Top Layer w8: U2.30 -364.45,-10 -313,-61.45 v1(-313,-74) ; v1(722,-761.55) 750.26,-789.81 LED11.3
  Bottom Layer w8: v1(-313,-74) -313,-145 15,-473 661,-473 722,-534 v1(722,-761.55)
NetLED11_4: LED11.4 U2.31 | length 2466.5
  Top Layer w8: U2.31 -350,10 -288.5,-51.5 -288.5,-90.5 -272.5,-106.5 -159.24,-106.5 -140.74,-88 68.95,-88 167.48,-186.53 167.48,-423 120.48,-470 -106,-470 -121,-485 -121,-611 -111,-621 -72,-621 -55,-638 -55,-826 -46,-835 783.66,-835 LED11.4
NetLED12_2: LED12.2 U2.26 | length 966.1
  Top Layer w8: U2.26 -366,-90 -356,-100 -356,-272.5 ; -144,-863 -120,-887 518,-887 562.84,-931.84 LED12.2
NetLED12_3: LED12.3 U2.27 | length 1770.6
  Top Layer w8: v1(-497.5,-70) U2.27 ; v1(409,-967.28) LED12.3
  Bottom Layer w8: v1(-497.5,-70) -462.5,-105 -462.5,-135 -498,-170.5 -498,-498 -346.63,-649.37 -263.63,-649.37 21.15,-934.15 375.87,-934.15 v1(409,-967.28)
NetLED12_4: LED12.4 U2.28 | length 2060
  Top Layer w8: U2.28 -360,-50 -345,-65 -345,-83 -322,-106 v1(-322,-234) ; LED12.4 634.81,-1008.19 697,-946 v1(697,-883)
  Bottom Layer w8: v1(-322,-234) -346,-210 -407.5,-210 -426,-228.5 -426,-253 -378,-301 -378,-341 -203,-516 378,-516 697,-835 v1(697,-883)
NetLED13_2: LED13.2 U2.23 | length 1747.5
  Top Layer w8: v1(-486,-125) -469.06,-141.94 U2.23 ; v1(-78,-946) 304.01,-946 318.01,-960 LED13.2
  Bottom Layer w8: v1(-486,-125) -535,-76 -563,-76 -579.06,-92.06 -579.06,-190.85 -586.56,-198.35 -586.56,-473.44 -114,-946 v1(-78,-946)
NetLED13_3: LED13.3 U2.24 | length 1766.7
  Top Layer w8: v1(-472,-218) -449.06,-195.06 U2.24 ; v1(231,-1032) 231,-1068.27 LED13.3
  Bottom Layer w8: v1(-472,-218) -476.5,-222.5 -476.5,-485.5 -326.63,-635.37 -256.63,-635.37 19,-911 415,-911 433,-929 433,-1001 402,-1032 v1(231,-1032)
NetLED13_4: LED13.4 U2.25 | length 1598.8
  Top Layer w8: v1(-396,-243) -396,-110 U2.25 ; v1(-154,-444) -154,-693 -200,-739 -200,-878 0,-1078 0,-1159 18,-1177 198.69,-1177 LED13.4
  Bottom Layer w8: v1(-396,-243) -357,-282 -271,-282 -154,-399 v1(-154,-444)
NetLED14_2: LED14.2 U2.20 | length 1337.4
  Top Layer w8: v1(-555.56,-108.5) -529.06,-135 U2.20 ; v1(31.49,-988) 35.43,-991.94 LED14.2
  Bottom Layer w8: v1(-555.56,-108.5) -555.56,-464.44 -356.63,-663.37 -293.13,-663.37 v1(31.49,-988)
NetLED14_3: LED14.3 U2.21 | length 1608.1
  Top Layer w8: U2.21 -509.06,-150 -510,-149.06 -510,-113.5 -497.5,-101 -447.5,-101 -429,-119.5 -429,-221 -468.5,-260.5 -593.7,-260.5 -609,-275.8 -609,-395 -608,-396 -487,-396 -480,-403 -480,-645 -108,-1017 -108,-1073.46 -85,-1096.46 LED14.3
NetLED14_4: LED14.4 U2.22 | length 1377.7
  Top Layer w8: U2.22 -489.06,-201 -555,-202 -628,-275 -628,-553.5 -147.5,-1034 -147.5,-1131.2 -135,-1143.7 LED14.4
NetLED15_2: LED15.2 U2.15 | length 1180.8
  Top Layer w8: v1(-630,-115) -629.06,-115.94 U2.15 ; LED15.2 -245,-1063.71 v1(-245,-1024)
  Bottom Layer w8: v1(-630,-115) -630,-130.94 -649.06,-150 -649.06,-585.5 -245,-989.56 v1(-245,-1024)
NetLED15_3: LED15.3 U2.16 | length 1477.2
  Top Layer w8: v1(-619,-211) -609.06,-201.06 U2.16 ; LED15.3 -308,-1039.92 v1(-308,-1005)
  Bottom Layer w8: v1(-619,-211) -598,-190 -598,-103 -615,-86 -644,-86 -656,-98 -732,-98 -748.5,-114.5 -748.5,-159.5 -709,-199 -688.5,-199 -687.5,-200 -687.5,-637.39 -319.89,-1005 v1(-308,-1005)
NetLED15_4: LED15.4 U2.17 | length 1081.6
  Top Layer w8: U2.17 -589.06,-215.06 -642,-268 -642,-775 -330.24,-1086.76 LED15.4
NetLED16_2: LED16.2 U2.12 | length 952.1
  Top Layer w8: U2.12 -711,-110 -687.5,-133.5 -687.5,-690.24 -689.5,-692.24 -689.5,-757.5 -517.54,-929.46 LED16.2
NetLED16_3: LED16.3 U2.13 | length 806.7
  Top Layer w8: U2.13 -669.06,-725.44 v1(-666,-728.5) ; v1(-622,-893) -617.76,-893 LED16.3
  Bottom Layer w8: v1(-666,-728.5) -666,-849 v1(-622,-893)
NetLED16_4: LED16.4 U2.14 | length 1178.6
  Top Layer w8: v1(-711,-222.5) -705,-228.5 -705,-907 -639.24,-972.76 LED16.4 ; v1(-669,-69) -669,-109.23 -649.06,-129.18 U2.14
  Bottom Layer w8: v1(-711,-222.5) -763,-170.5 -763,-88.5 -743.5,-69 v1(-669,-69)
NetLED17_2: LED17.2 U2.9 | length 1139.9
  Top Layer w8: LED17.2 -750.26,-804.74 -721,-834 -721,-882 -735,-896 -779,-896 -878,-797 -878,-743 -808,-673 -808,-80 -778,-50 U2.9
NetLED17_3: LED17.3 U2.10 | length 814.1
  Top Layer w8: LED17.3 -766.26,-750.26 -732,-716 v1(-732,-274) ; v1(-784,-247) -784,-88 -766,-70 U2.10
  Bottom Layer w8: v1(-784,-247) -757,-274 v1(-732,-274)
NetLED17_4: LED17.4 U2.11 | length 752.1
  Top Layer w8: LED17.4 -835.17,-782.27 -835.17,-727.67 -760.5,-653 -760.5,-106.3 -744.2,-90 U2.11
NetLED18_2: LED18.2 U2.6 | length 769.4
  Top Layer w8: LED18.2 -923,-578.63 -933.81,-567.81 -916,-550 v1(-890,-550) ; v1(-901,-390) -850,-339 -850,-20 -820,10 U2.6
  Bottom Layer w8: v1(-901,-390) -901,-539 v1(-890,-550)
NetLED18_3: LED18.3 U2.7 | length 659.2
  Top Layer w8: LED18.3 -967.28,-509.28 -837,-379 -837,-345.8 -836,-344.8 -836,-35 -811,-10 U2.7
NetLED18_4: LED18.4 U2.8 | length 989.8
  Top Layer w8: LED18.4 -1008.19,-631 -954.19,-685 -899,-685 -823,-609 -823,-351.6 -822,-350.6 -822,-58 -794,-30 U2.8
NetLED19_2: LED19.2 U2.2 | length 816.8
  Top Layer w8: LED19.2 -1039.94,-328 -966,-328 -887,-249 v1(-887,-48) ; v1(-972,-51) -972,-12 -882.85,77.15 -781.65,77.15 -768.8,90 U2.2
  Bottom Layer w8: v1(-972,-51) -972,-50 -970,-48 v1(-887,-48)
NetLED19_3: LED19.3 U2.3 | length 589.3
  Top Layer w8: LED19.3 -1058.82,-259 -994,-259 -933,-198 -933,-19 -861,53 -784.65,53 -767.65,70 U2.3
NetLED19_4: LED19.4 U2.5 | length 1008.7
  Top Layer w8: LED19.4 -1178,-197.69 -1178,75 -1138,115 -807,115 -788,134 -698,134 -687,123 -687,38 -695,30 U2.5
NetLED20_2: LED20.2 U2.47 | length 639.6
  Top Layer w8: LED20.2 -1055.43,-35.43 v1(-969,51) ; v1(-649.06,21) U2.47
  Bottom Layer w8: v1(-969,51) -946,28 -656.06,28 v1(-649.06,21)
NetLED20_3: LED20.3 U2.48 | length 866.5
  Top Layer w8: LED20.3 -1095.89,36 v1(-1056,36) ; U2.48 -669.06,151 -673,151 -673,-9 -625,-57 v1(-616,-57)
  Bottom Layer w8: v1(-1056,36) -1056,-64.5 -1035,-85.5 -781,-85.5 -740.5,-45 -637,-45 -625,-57 v1(-616,-57)
NetLED20_4: LED20.4 U2.1 | length 475.9
  Top Layer w8: LED20.4 -1143.7,77.5 -1125.2,96 -799,96 -786.18,108.82 -724.06,108.82 U2.1
NetLED21_2: LED21.2 U1.36 | length 1741.5
  Top Layer w8: LED21.2 -1068.27,236.27 v1(-997.5,165.5) ; v1(290,-111.72) 332.72,-111.72 340,-119 369.06,-119 378.06,-110 U1.36
  Bottom Layer w8: v1(-997.5,165.5) -997.5,24.5 -985,12 -773,12 -746,-15 -568,-15 -530.5,22.5 -359.95,22.5 -353.45,16 164.5,16 290,-109.5 v1(290,-111.72)
NetLED21_3: LED21.3 U1.37 | length 2107.8
  Top Layer w8: LED21.3 v1(-994,318.01) ; v1(288,191) 281,184 281,82 263,64 263,-126 297,-160 449.06,-160 U1.37
  Bottom Layer w8: v1(-994,318.01) -994,432 -982,444 -923,444 -659,180 -468,180 -451.5,196.5 -255.5,196.5 -250,191 v1(288,191)
NetLED21_4: LED21.4 U1.38 | length 3913
  Top Layer w8: LED21.4 -1095.56,365 -982.5,365 -970,352.5 -970,157 -985,142 -1037,142 v1(-1066,171) ; v1(383,-607) 383,-314.06 469.06,-228 U1.38
  Bottom Layer w8: v1(-1066,171) -1101,136 -1101,-270 -1029,-342 -1029,-471 -703,-797 -703,-868 -621,-950 -489,-950 -350,-1089 351.77,-1089 367.27,-1104.5 395.5,-1104.5 447,-1053 447,-671 v1(383,-607)
NetLED22_2: LED22.2 U1.32 | length 2270.7
  Top Layer w8: v1(-967.28,412.28) LED22.2 ; U1.32 445,-30 477,-62 600.5,-62 613.5,-49 613.5,78.5 591,101 v1(528,101)
  Bottom Layer w8: v1(-967.28,412.28) -967.28,402.28 -660,95 -523,95 -472.5,145.5 -341,145.5 -318,168.5 -296,168.5 -283.5,156 249,156 281.5,123.5 328.5,123.5 332,127 391,127 430.5,87.5 514.5,87.5 v1(528,101)
NetLED22_3: LED22.3 U1.34 | length 1846.8
  Top Layer w8: v1(-931.84,154.43) LED22.3 ; v1(297,-44) 323,-70 U1.34
  Bottom Layer w8: v1(-931.84,154.43) -823.16,45.75 -363.12,45.75 -347.37,30 178.5,30 252.5,-44 v1(297,-44) v1@297,-40.56
NetLED22_4: LED22.4 U1.35 | length 2222.3
  Top Layer w8: LED22.4 -946.29,629 -906,629 -892,615 -892,209 -839,156 v1(-812,156) ; v1(355,-95) 360,-90 U1.35
  Bottom Layer w8: v1(-812,156) -812,104 -784,76 -318,76 -307,65 221,65 259,27 375,27 401,53 449,53 472,30 472,-2 379,-95 v1(355,-95)
NetLED23_2: LED23.2 U1.29 | length 1818.8
  Top Layer w8: v1(-800.37,282) LED23.2 ; v1(305,147) 305,89 364,30 U1.29
  Bottom Layer w8: v1(-800.37,282) -679.37,161 -359.75,161 -338.25,182.5 -269.5,182.5 -263.25,176.25 255.31,176.25 284.56,147 v1(305,147)
NetLED23_3: LED23.3 U1.30 | length 2131.2
  Top Layer w8: v1(-813.78,203) -750.26,266.52 LED23.3 ; U1.30 439,10 v1(439.61,10.61)
  Bottom Layer w8: v1(-813.78,203) -871,145.78 -871,121.59 -809.16,59.75 -348.25,59.75 -339,50.5 178.15,50.5 218.04,10.61 v1(439.61,10.61)
NetLED23_4: LED23.4 U1.31 | length 1789
  Top Layer w8: LED23.4 -783.66,835 -709,835 -524,650 -485,650 -453.5,618.5 -453.5,470 -323.5,340 -323.5,163 -330.5,156 -330.5,123 v1(-299,91.5) ; v1(288.5,55) 288.5,2.5 301,-10 U1.31
  Bottom Layer w8: v1(-299,91.5) -299,82.5 -298,81.5 262,81.5 v1(288.5,55)
NetLED24_2: LED24.2 U1.26 | length 1668.5
  Top Layer w8: LED24.2 -501.84,931.84 -433,863 -433,484.38 -307,358.38 v1(-307,145) ; v1(352,103.5) 365.5,90 U1.26
  Bottom Layer w8: v1(-307,145) -294.5,132.5 244.5,132.5 267.5,109.5 346,109.5 v1(352,103.5)
NetLED24_3: LED24.3 U1.27 | length 1777
  Top Layer w8: LED24.3 -488.28,967.28 v1(-410,889) ; U1.27 415,70 428,83 428,164.5 v1(407.5,185)
  Bottom Layer w8: v1(-410,889) -410,243.5 -381.06,214.56 311,214.56 340.56,185 v1(407.5,185)
NetLED24_4: LED24.4 U1.28 | length 3262.8
  Top Layer w8: v1(-851,244) -851,685 -898,732 -898,773 -662.81,1008.19 LED24.4 ; U1.28 v1(494,50)
  Bottom Layer w8: v1(-851,244) -1011.5,244 -1028,227.5 -1028,14 -1010,-4 -877,-4 -852,-29 -601,-29 -586.82,-43.18 -520.68,-43.18 -471.5,6 -367.45,6 -363.45,2 124,2 264,-138 407.09,-138 494,-51.09 v1(494,50)
NetLED25_2: LED25.2 U1.23 | length 1623.9
  Top Layer w8: LED25.2 -318.01,1015.01 v1(-308,1005) ; U1.23 469.06,193.78 462.5,200.33 462.5,247.5 546.5,331.5 546.5,367 567,387.5 v1(567,567)
  Bottom Layer w8: v1(-308,1005) -223,1090 44,1090 v1(567,567)
NetLED25_3: LED25.3 U1.24 | length 1733.2
  Top Layer w8: LED25.3 -249.56,939.56 v1(-240,930) ; v1(293,278) 293,253 312,234 395.06,234 449.06,180 U1.24
  Bottom Layer w8: v1(-240,930) -240,537 -382,395 -382,314 -365,297 274,297 v1(293,278)
NetLED25_4: LED25.4 U1.25 | length 1930.9
  Top Layer w8: v1(-295,578) -295,644 -270,669 -270,979 -284,993 -284,1091.69 LED25.4 ; v1(380,161) 380,110 U1.25
  Bottom Layer w8: v1(-295,578) -396,477 -396,265 -359.56,228.56 325,228.56 342.56,211 428.67,211 434.33,205.34 434.33,167.83 427.5,161 v1(380,161)
NetQ1_3: Q1.3 R4.1 | length 1115.9
  Top Layer w8: R4.1 -247.37,29 -271,52.63 -271,577.5 -208.5,640 -15.5,640 -3,652.5 -3,702.5 73.62,779.12 75,796.73 Q1.3
NetQ1_6: Q1.6 R6.1 | length 1688.8
  Top Layer w8: Q1.6 184,839.09 185,838.09 185,777.5 100,692.5 100,652.5 77.5,630 37,630 -10,583 -10,445.5 -22.5,433 -97.43,433 -98.43,434 -98.43,491.43 -104,497 -227.5,497 -251,473.5 -251,77 -250,76 126.76,76 R6.1
NetQ2_6: Q2.6 R7.1 | length 2939.9
  Top Layer w8: v1(-184.5,-69) -181.43,-65.93 R7.1 ; Q2.6 327.5,840.08 345,857.58 v1(345,989) ; v1(746,-246) 888,-246 v1(901,-233)
  Bottom Layer w8: v1(-184.5,-69) -7.5,-246 v1(746,-246) ; v1(345,989) 537,989 901,625 v1(901,-233)
NetR1_1: R1.1 U1.44 | length 135.3
  Top Layer w8: U1.44 589.06,-263.62 R1.1
NetR2_1: R2.1 U2.44 | length 940.2
  Top Layer w8: R2.1 -667,356.57 -667,570 -647.5,589.5 -469,589.5 -467.5,588 -467.5,544 -543,468.5 -543,257.06 -589.06,211 U2.44
NetR8_2: R8.2 U3.6 | length 167.6
  Top Layer w8: R8.2 -193.12,862 -85.63,862 U3.6
QTOUCH1: P4.3 U4.1 | length 1524.3
  Top Layer w8: P4.3 230.49,-543.51 230.49,90.99 249,109.5 249,309 255.5,315.5 329,315.5 330.5,314 330.5,290.65 336.15,285 399,285 403,289 403,400 395,408 395,548.4 396,549.4 U4.1
QTOUCH2: P4.1 U5.1 | length 479.5
  Top Layer w8: U5.1 -450.4,-505.6 -355,-601 v1(-226,-601)
  Bottom Layer w8: v1(-226,-601) -153,-674 P4.1
SCL: P2.4 R3.1 U1.46 U2.46 | length 4194.6
  Top Layer w8: v1(-705,701) -705,326 -629.06,250.06 U2.46 ; P2.4 246,559.06 246,554.57 R3.1 ; U1.46 629.06,-203 635.06,-209 850,-209 v1(855,-204)
  Bottom Layer w8: v1(-705,701) -298,1108 115,1108 442,781 640,781 656,765 656,552 585.5,481.5 ; P2.4 507.94,559.06 585.5,481.5 ; v1(855,-204) 855,212 585.5,481.5
SDA: P2.3 R5.1 U1.45 U2.45 | length 3366.1
  Top Layer w8: U2.45 -609.06,286.94 -602,294 -602,455 v1(-491,566) ; P2.3 89.94,599 223,599 232,590 284.57,590 R5.1 322,552.57 v1(322,505) ; U1.45 609.06,-113.2 v1(611,-111.26)
  Bottom Layer w8: v1(-491,566) -491,867 -396,962 -222.5,962 -204,943.5 -204,664 -165,625 -35,625 30.94,559.06 P2.3 ; v1(322,505) 340,523 518,523 837.5,203.5 837.5,-172.5 824,-186 685.74,-186 v1(611,-111.26)
SDB: P2.2 R11.2 U1.39 U2.39 | length 2084.3
  Top Layer w8: U2.39 -489.06,258.94 -485,284.79 -440.29,329.5 v1(-347,329.5) ; R11.2 -64.57,522 -65,522.43 -65,559.06 P2.2 ; v1(474,125) 615,125 629,111 629,-60 607,-82 520.94,-82 489.06,-113.89 U1.39
  Bottom Layer w8: v1(-347,329.5) -279.56,329.5 P2.2 198.06,311 305,311 377,239 458,239 462.33,234.67 462.33,136.67 v1(474,125)
SYNC/MODE: P4.2 U4.6 U5.6 | length 2510.7
  Top Layer w8: v1(-453,-284) -453,-349.16 U5.6 ; P4.2 41,-715 146,-715 249,-612 249,82 264,97 264,288 277.5,301.5 315,301.5 316.5,300 316.5,265 331.34,250.16 440.25,250.16 526.86,336.78 526.86,367.86 553,394 553,538.4 542,549.4 U4.6
  Bottom Layer w8: v1(-453,-284) -453,-314 -150,-617 -57,-617 P4.2
VCC: C1.1 C2.1 C3.1 C4.1 C7.1 C8.1 C9.1 C10.1 D1.1 D2.1 LED1.1 LED2.1 LED3.1 LED4.1 LED5.1 LED6.1 LED7.1 LED8.1 LED9.1 LED10.1 LED11.1 LED12.1 LED13.1 LED14.1 LED15.1 LED16.1 LED17.1 LED18.1 LED19.1 LED20.1 LED21.1 LED22.1 LED23.1 LED24.1 LED25.1 P3.2 R3.2 R5.2 U1.41 U2.40 U2.41 U4.5 U5.5 | length 2066.4
  Top Layer w12: v1@-1143.7,-81.7 LED20.1 ; v1(-1131,212) -1131,244.69 LED21.1 ; LED19.1 -1072,-353.8 v1(-1072,-375) ; v1(-1035,498) LED22.1@-1008.19,524.81 ; LED18.1 -972.76,-620.24 v1(-945,-648) ; v1(-865,750) -865,752.44 LED23.1 ; LED17.1 v1@-752,-865.44 ; v1(-644,951) LED24.1@-622.24,972.76 ; C9.1 C10.1 -525,-352.5 v1(-525,-322) ; LED16.1 -492.81,-1008.19 v1(-480,-1021) ; v1(-529.06,126.5) U2.41 ; v1(-521.56,203.5) -509.06,191 U2.40 ; v1(-508.5,286.81) C4.1 -509,325 -509,365.5 -508.5,366 C3.1 ; v1(-417,-304) -417,-333.76 -410,-340.76 -417,-347.76 U5.5 ; v1(-380,1081) -344.8,1081 LED25.1 ; LED15.1 -234.69,-1141 v1(-204,-1141) ; v1(-88,1144) LED2.1@-35.73,1144 ; LED14.1 v1(82,-1143.7) ; LED1.1 v1(83,-23.62) ; v1(208,1124) 218.1,1113.9 LED3.1 ; R3.2 255,652.5 268.09,665.59 v1(280,665.59) ; R5.2 v1(320,665.59) ; LED13.1 344.8,-1081 v1(377,-1081) ; v1(468.59,499.5) 481.09,512 U4.5 ; v1(494,1031) 516.81,1008.19 LED4.1 ; C8.1 505.5,630 506,630.5 505.5,631.01 C7.1 v1(505.5,687.19) ; U1.41 529.06,-121.94 v1(532.53,-118.47) ; C2.1 552,-290 552,-355 C1.1 552,-355.5 v1(552,-407) ; LED12.1 622.24,-972.76 v1(650,-945) ; v1(752,867) 752,865.44 LED5.1 ; LED11.1 v1(869,-748.44) ; v1(941,646) 972.76,614.24 LED6.1 ; LED10.1 1035,-514.35 v1(1035,-495) ; LED7.1 1088,337.8 1096,345.8 v1(1096,375) ; LED9.1 1128,-247.69 v1(1128,-213) ; v1@1140,88.5 v1(1143.7,84.8) LED8.1
  other v1: -752,-866 -1144,-82

## Polygon pours and split planes (outlines as drawn)
GND on Bottom Layer "NONET_L04_P003" (hatched 45Degree grid 20 track 8, remove dead copper, shelved, pour order 3): 0,-1230.32 cw(c0,0) -1230.32,0 cw(c0,0) 0,1230.32 cw(c0,0) 1230.32,0 cw(c0,0)
GND on Top Layer "NONET_L01_P002" (hatched 45Degree grid 20 track 8, remove dead copper, shelved, pour order 2): 0,-1230.32 cw(c0,0) -1230.32,0 cw(c0,0) 0,1230.32 cw(c0,0) 1230.32,0 cw(c0,0)
GND on Ground Plane (split plane): 257 vertices, not listed, extent -1210.3,-1210.3 1210.3,1210.3
VCC on Power Plane (split plane): 257 vertices, not listed, extent -1210.3,-1210.3 1210.3,1210.3

## Keep-outs
Mechanical 3:
  circle w39.37: c0,0 r996.06

## Other copper
Top Layer:
  rectangle net CAPIN1: -236.22,118.11 236.22,393.7

## Silkscreen, mask and mechanical layers (free items; w line width, h text height)
Top Overlay:
  drawing of 4068 lines, arcs and shapes, not listed
  text "PROTO_QTOUCH" at 313,280 h19.68
  text "2016/01/22 CycleLabs Solutions inc." at 182.12,242.69 h19.68
Bottom Overlay:
  text "C_B" at 193,762 h50
  text "C_R" at -7,761 h50
  text "C_G" at 93,761 h50
  text "FR" at -124,760 h50
  text "SDA" at 96,459 h50
  text "SCL" at 191,459 h50
  text "GND" at -107,458 h50
  text "SDB" at -9,458 h50
  text "GND" at -7,-491 h50
  text "VCC" at 98,-491 h50
Outline:
  circle w10: c0,0 r1230.32